# Altium PCB Boost-to-12V-simplify_test2.PcbDoc
Units mil, origin at the board's own origin, x right, y up, seen from the top; angles counter-clockwise.
Board outline 6000 x 4000 mil, 2 copper layers (Top Layer, Bottom Layer); 13 components, 7 nets, 29 pads, 0 vias.
Unrouted connection lines stored in the file: 21.
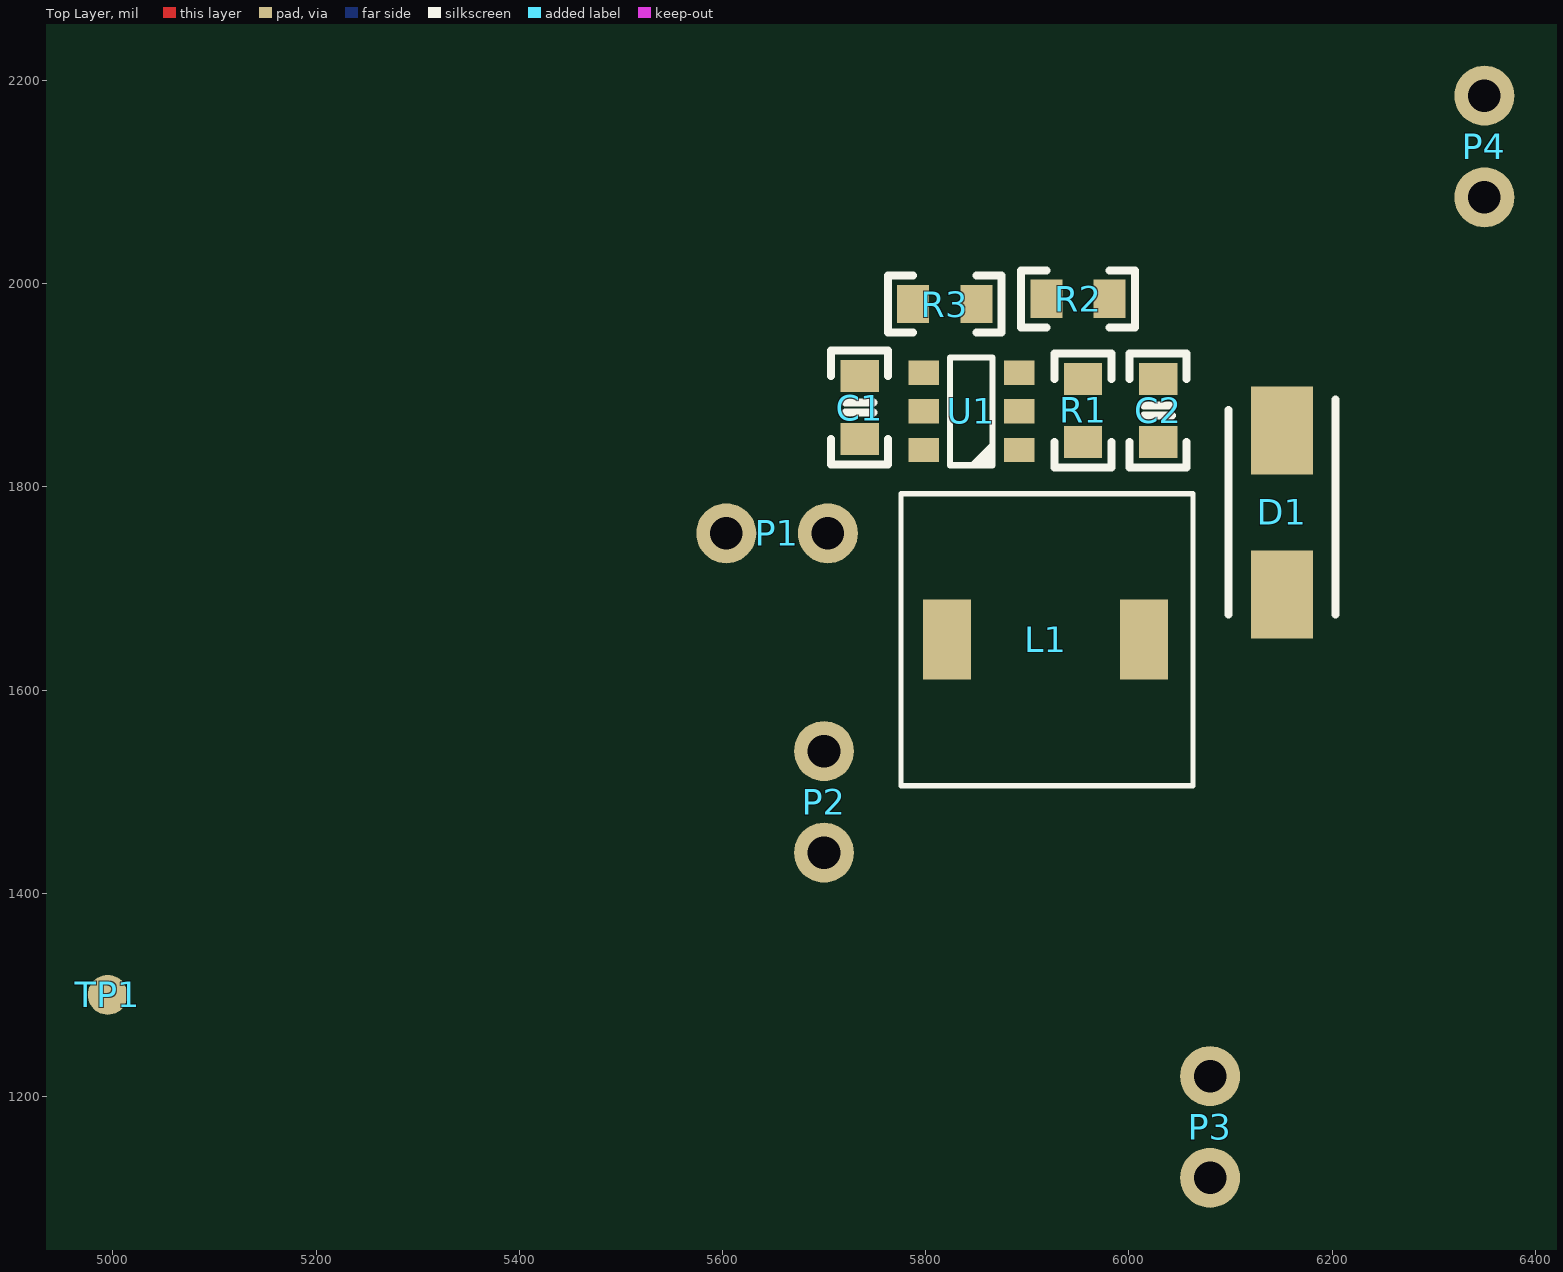
[diagram p0: Top Layer view]
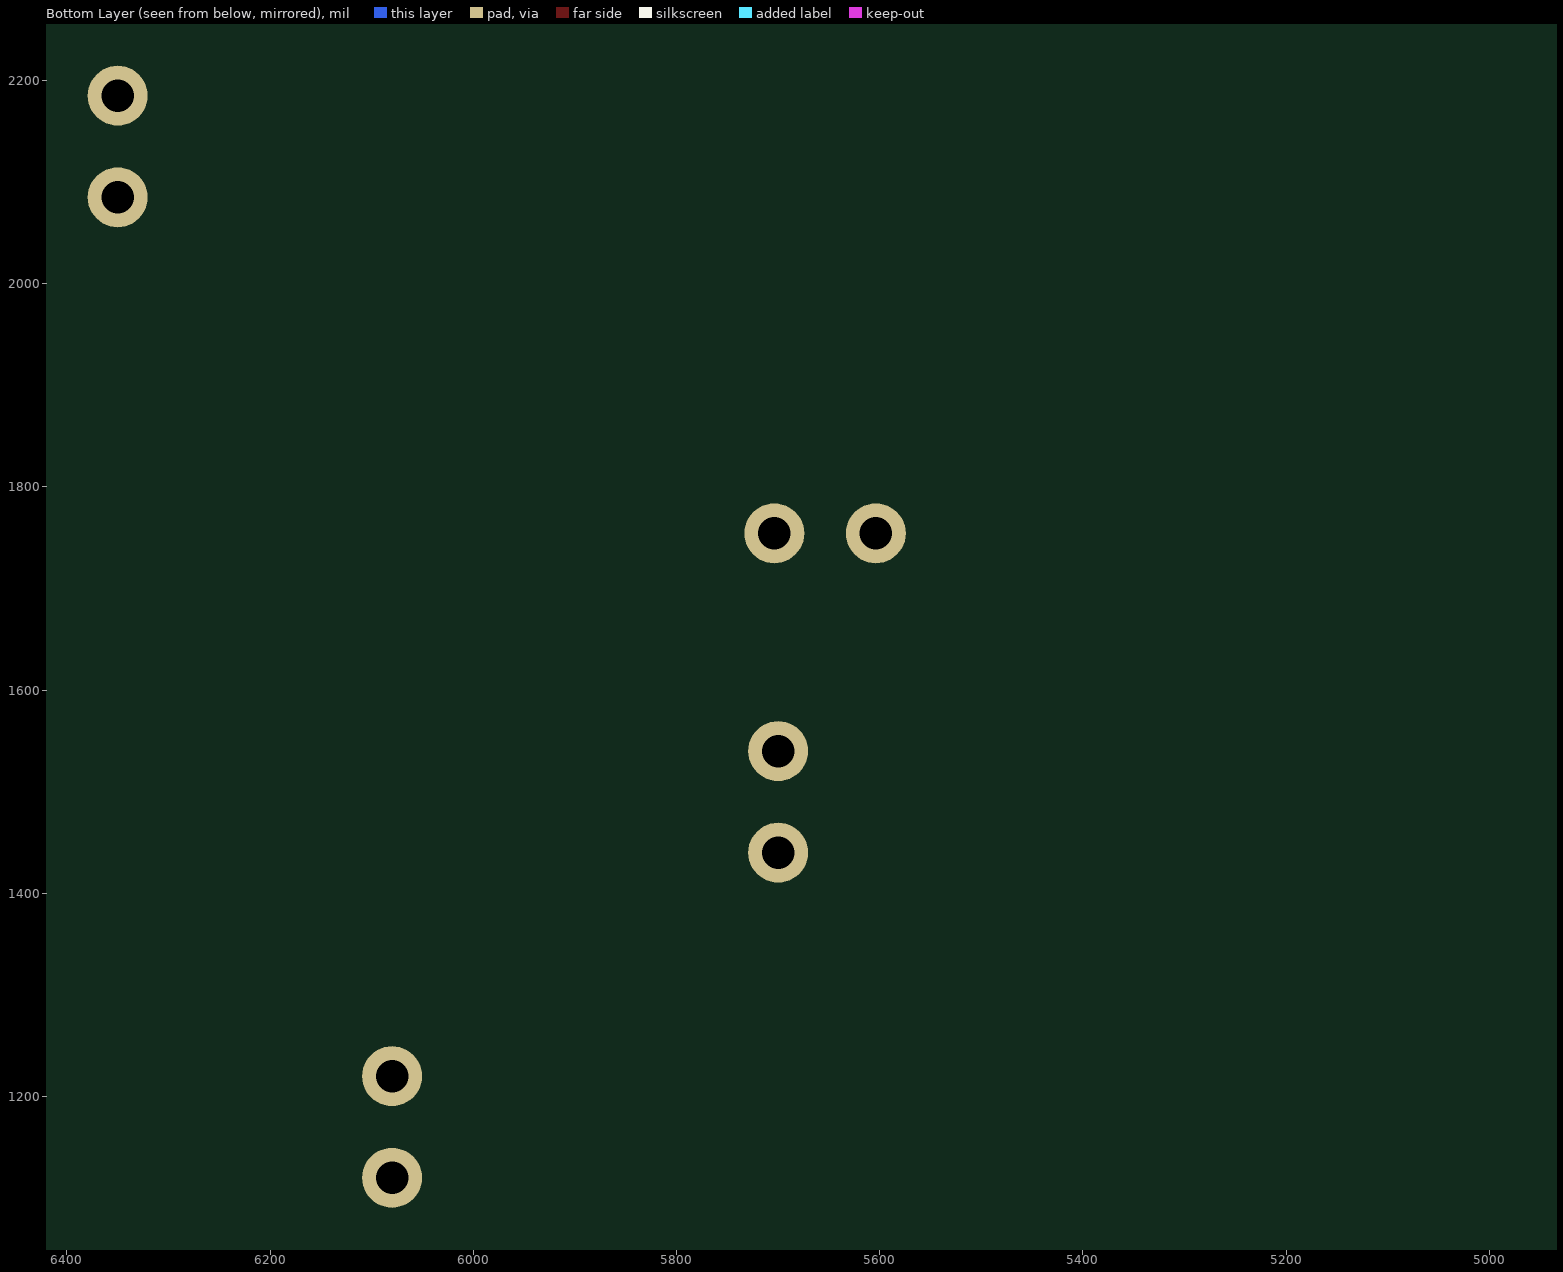
[diagram p1: Bottom Layer view, seen from below]

## Layer stack, top to bottom
Top Solder: solder mask 0.4, Solder Resist, Dk 3.5
Top Layer: signal copper 1.4
Dielectric 1: dielectric 12.6, FR-4, Dk 4.8
Bottom Layer: signal copper 1.4
Bottom Solder: solder mask 0.4, Solder Resist, Dk 3.5

## Board outline
1000,1000 7000,1000 7000,5000 1000,5000

## Design rules (kind name [scope] priority, off if disabled: settings)
Clearance [All] p1: gap=10 ignorepadtopadclearanceinfootprint=FALSE except(0: Arc-Hole Track-Hole SMDPad-Hole THPad-Hole Via-Hole Fill-Hole Poly-Hole Region-Hole Text-Hole)
PolygonConnect [All] p1: connectstyle=Relief reliefconductorwidth=10 reliefentries=4 polygonreliefangle="90 Angle" airgapwidth=10
RoutingVias [All] p1: holewidth=28 width=50 viastyle="Through Hole" minholewidth=28 minwidth=50 maxholewidth=28 maxwidth=50
SolderMaskExpansion [All] p1: expansion=4 istentingtop=FALSE
Width [All] p1: maxlimit=10 minlimit=10 preferedwidth=10
30 further rules are at their usual default settings.

## Components (designator, comment, footprint, x,y, rotation, side; value= is the part's Value field where it differs from the comment)
C1 "22uF/25V" CAP-0603 5735.05,1878.12 r270 top
C2 "22uF/25V" CAP-0603 6028.83,1875.22 r90 top
D1 "SS34" DO-214AC_SMA 6150.8,1775 r270 top
L1 "4.7uH/4A" SMD_7.3x7.3x4.2mm 5900.83,1635 r0 top
P1 "HDR1x2_2.54" HDR1X2_2.54_180 5603.79,1754.28 r90 top
P2 "HDR1x2_2.54" HDR1X2_2.54_180 5700,1540 r0 top
P3 "HDR1x2_2.54" HDR1X2_2.54_180 6080,1220 r0 top
P4 "HDR1x2_2.54" HDR1X2_2.54_180 6350,2185 r0 top
R1 "594R" R-0603 5954.95,1875.22 r90 top
R2 "10k" R-0603 5950,1985 r0 top
R3 "100k" R-0603 5818.9,1980 r0 top
TP1 "TestPoint" TestPoint 4995,1300 r90 top
U1 "SX1308" SOT-23-6 5845,1874.29 r0 top

## Footprints (in the part's own frame and the unit in brackets; to place one, negate y for a bottom-side part, rotate by r counter-clockwise, add the part's x,y. Pads: shape width x height; smd on the part's side, far side on the other; paste and mask are expansions set on the pad)
CAP-0603 [mm]
  rect 0.8x0.96 smd: 1(-0.79,0) 2(0.79,0)
  silkscreen extent -1.42,-0.71 1.42,0.71, body extent -0.76,-0.39 0.76,0.39, height 0.9
DO-214AC_SMA [mm]
  rect 2.2x1.55 smd: 1(2.05,0) 2(-2.05,0)
  silkscreen extent -2.83,-1.33 2.55,1.33, body extent -2.55,-1.33 2.55,1.33, height 2.29
HDR1X2_2.54_180 [mm]
  round 1.5 hole 0.813: 1(0,0) 2(0,-2.54)
  body extent -1.25,-3.81 1.25,1.27, height 8.2
R-0603 [mm]
  rect 0.8x0.96 smd: 1(-0.79,0) 2(0.79,0)
  silkscreen extent -1.42,-0.71 1.42,0.71, body extent -0.76,-0.38 0.76,0.38, height 0.41
SMD_7.3x7.3x4.2mm [mm]
  rect 1.2x2 smd: 1(-2.02,0.37) 2(2.9,0.37)
  silkscreen extent -3.18,-3.28 4.12,4.02, body extent -3.18,-3.28 4.1,4, height 3
SOT-23-6 [mil]
  rect 30x24 smd: 1(47,-38) 2(47,0) 3(47,38) 4(-47,38) 5(-47,0) 6(-47,-38)
  silkscreen extent -21,-53 21,53, body extent -55,-57 55,57, height 57
TestPoint [mm]
  round 1 smd: 1(0,0)

## Part data
C1 C2: library part CAP, "X7R", Package=0402, SuppliersPartNumber=C52923, ComponentLink1Description=供应商链接, ComponentLink1URL=http://www.szlcsc.com/product/details_53938.html, Supplier=LC
D1: library part DIODE, "肖特基二极管", Package=SMA(DO-214AC), SuppliersPartNumber=C22452, ComponentLink1Description=供应商链接, ComponentLink1URL=http://www.szlcsc.com/product/details_23178.html, Supplier=LC
L1: library part INDUCTOR, "电感", Package=0402, SuppliersPartNumber=C32041, ComponentLink1Description=供应商链接, ComponentLink1URL=http://www.szlcsc.com/product/details_33003.html, Supplier=LC
P1 P2 P3 P4: "Header"
R1 R2 R3: library part RES, "贴片电阻", Package=0805, SuppliersPartNumber=C17798, Supplier=LC
TP1: "测试点"
U1: "集成升压芯片", Manufacturer_Name="Shenzhen Suosemi Tech", Datasheet Link=https://datasheet.lcsc.com/szlcsc/Shenzhen-Suosemi-Tech-SX1308_C78162.pdf, Height=1.45mm, Manufacturer_Part_Number=SX1308

## Nets (pads, with @x,y where several pads share a name; then routed paths per layer and width w, separated by ;. In a path a pad name is that pad's centre, name@x,y a point inside that pad or via, vN(x,y) a via of type N, cw(c..) or ccw(c..) an arc to the next point about the centre after c; other vN are vias at no path point)
5V: C1.2 L1.1 P1.1 P1.2 U1.5
12V: C2.2 D1.2 P3.1 P3.2 R2.2
GND: C1.1 C2.1 P2.1 P2.2 P4.1 P4.2 R1.1 U1.2
NetD1_1: D1.1 L1.2 U1.1
NetR1_2: R1.2 R2.1 U1.3
NetR3_1: R3.1 TP1.1
NetR3_2: R3.2 U1.4
pads on no net: U1.6